# Altium PCB DIOT_Sampler.PCBDOC (part 5 of 8)
Units mm, origin at the board's own origin, x right, y up, seen from the top; angles counter-clockwise.
Board outline 221.17 x 100 mm, 4 copper layers (Top, GP1(GND), L3, Bot), stack 1.648 mm thick; 666 components, 413 nets, 2132 pads, 925 vias.
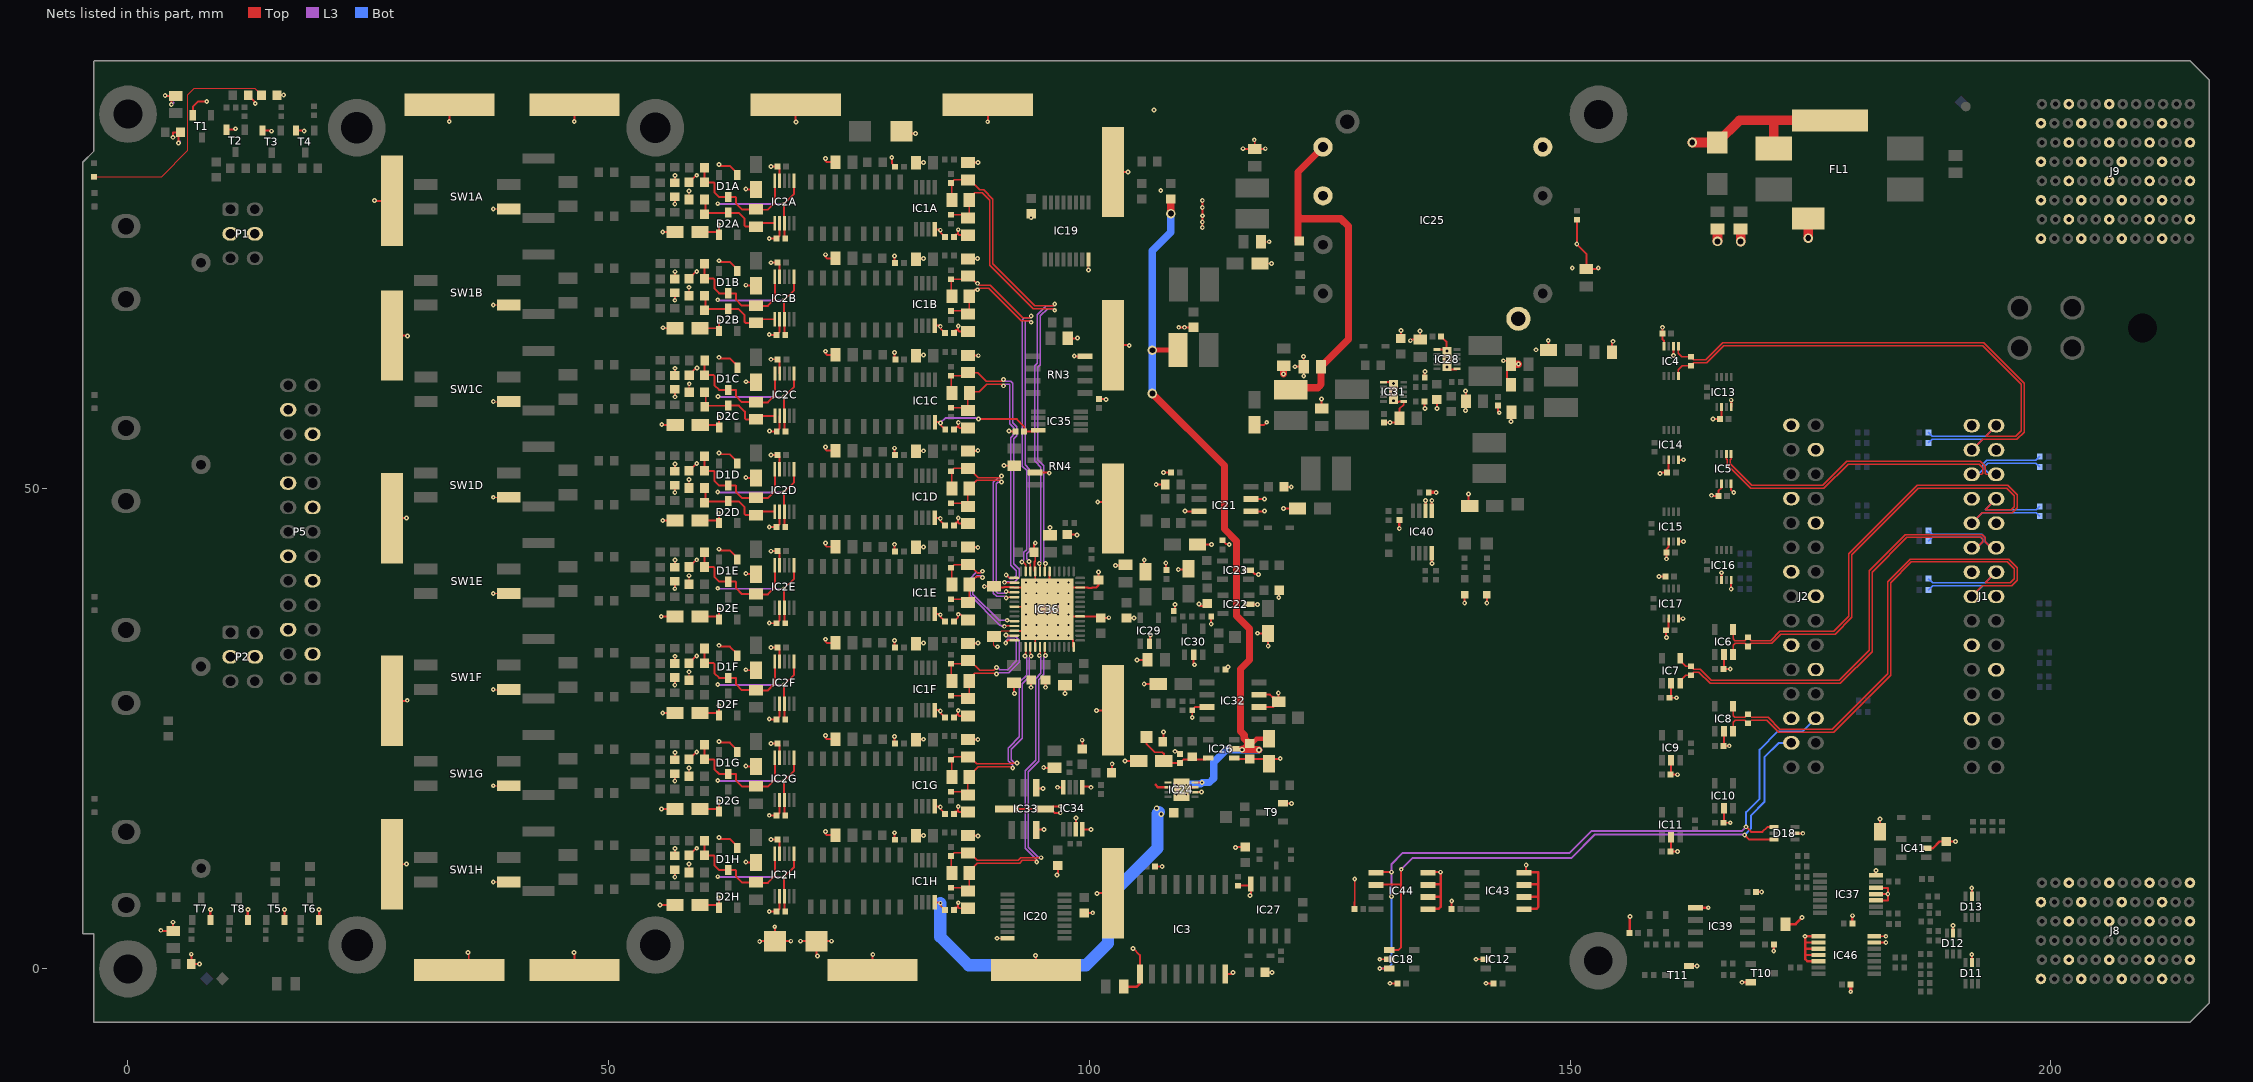
[diagram p6: the nets of this part, all layers, seen from the top]

## Via types
v1: diameter 0.5, hole 0.2, Top to Bot, tented both sides, 704 vias
v2: diameter 0.5, hole 0.2, Top to Bot, 180 vias
v3: diameter 0.6, hole 0.3, Top to Bot, tented both sides, 17 vias
v4: diameter 1, hole 0.6, Top to Bot, tented both sides, 16 vias
v5: diameter 0.6, hole 0.3, Top to Bot, 6 vias
v6: diameter 1.27, hole 0.711, Top to Bot, 2 vias

## Nets (pads, with @x,y where several pads share a name; then routed paths per layer and width w, separated by ;. In a path a pad name is that pad's centre, name@x,y a point inside that pad or via, vN(x,y) a via of type N, cw(c..) or ccw(c..) an arc to the next point about the centre after c; other vN are vias at no path point) (continued)
GND: C1A.1 C1B.1 C1C.1 C1D.1 C1E.1 C1F.1 C1G.1 C1H.1 C3A.1 C3B.1 C3C.1 C3D.1 C3E.1 C3F.1 C3G.1 C3H.1 C4A.1 C4B.1 C4C.1 C4D.1 C4E.1 C4F.1 C4G.1 C4H.1 C5A.1 C5B.1 C5C.1 C5D.1 C5E.1 C5F.1 C5G.1 C5H.1 C7A.2 C7B.2 C7C.2 C7D.2 C7E.2 C7F.2 C7G.2 C7H.2 C8A.2 C8B.2 C8C.2 C8D.2 C8E.2 C8F.2 C8G.2 C8H.2 C9A.1 C9B.1 C9C.1 C9D.1 C9E.1 C9F.1 C9G.1 C9H.1 C10A.1 C10B.1 C10C.1 C10D.1 C10E.1 C10F.1 C10G.1 C10H.1 C11A.1 C11B.1 C11C.1 C11D.1 C11E.1 C11F.1 C11G.1 C11H.1 C12A.1 C12B.1 C12C.1 C12D.1 C12E.1 C12F.1 C12G.1 C12H.1 C13A.1 C13B.1 C13C.1 C13D.1 C13E.1 C13F.1 C13G.1 C13H.1 C14A.1 C14B.1 C14C.1 C14D.1 C14E.1 C14F.1 C14G.1 C14H.1 C15.1 C16.1 C17.1 C18.1 C19.1 C20.1 C21.1 C22.1 C23.1 C24.1 C25.1 C27.1 C28.1 C30.1 C32.1 C33.1 C34.2 C36.2 C37.1 C38.2 C39.1 C41.1 C43.1 C44.2 C45.1 C47.2 C48.1 C49.1 C50.2 C51.1 C52.2 C53.1 C54.1 C55.1 C56.1 C57.1 C58.1 C59.1 C60.1 C61.1 C62.1 C63.1 C64.1 C65.1 C66.1 C67.2 C68.1 C69.1 C70.1 C71.1 C72.1 C73.1 C74.1 C76.1 C77.2 C78.1 C79.1 C80.2 C81.1 C83.1 C84.2 C85.1 C86.1 C87.1 C88.1 C89.1 C90.1 C91.1 C92.1 C93.1 C94.1 C95.1 C96.1 C97.1 C98.1 C99.1 C100.1 C101.1 C102.1 C103.1 C104.1 C105.1 C106.1 C108.1 C109.1 C110.1 C111.1 C112.1 C113.1 C114.1 C115.1 C117.1 C118.2 C119.1 C120.1 C121.1 C122.1 C123.1 CLIP1.1 CLIP2.1 CLIP3.1 CLIP4.1 CLIP5.1 CLIP6.1 CLIP7.1 CLIP8.1 CLIP9.1 CLIP10.1 CLIP11.1 CLIP12.1 CLIP13.1 CLIP14.1 CLIP15.1 CLIP16.1 CLIP17.1 CLIP18.1 D5.2 D6.1 D11.2 D12.2 D13.2 D16.2 D18.2 FL1.4 IC2A.2 IC2A.9 IC2B.2 IC2B.9 IC2C.2 IC2C.9 IC2D.2 IC2D.9 IC2E.2 IC2E.9 IC2F.2 IC2F.9 IC2G.2 IC2G.9 IC2H.2 IC2H.9 IC3.1 IC3.8 IC4.2 IC4.4 IC5.2 IC5.4 IC6.2 IC7.2 IC8.2 IC9.2 IC10.2 IC11.2 IC12.2 IC13.2 IC13.4 IC14.2 IC14.4 IC15.2 IC15.4 IC16.2 IC16.4 IC17.2 IC17.4 IC18.2 IC19.8 IC20.8 IC21.3 IC21.6 IC21.7 IC22.2 IC23.2 IC24.6 IC25.3 IC25.5 IC25.8 IC26.1 IC27.4 IC28.1 IC28.6 IC28.11 IC29.2 IC30.2 IC31.1 IC31.6 IC31.11 IC32.3 IC32.6 IC32.7 IC33.3 IC33.4 IC33.5 IC33.8 IC34.3 IC34.4 IC34.5 IC34.8 IC36.3 IC36.7 IC36.12 IC36.18 IC36.26 IC36.32 IC36.38 IC36.46 IC36.49 IC36.53 IC37.3 IC37.4 IC37.5 IC37.7 IC39.1 IC40.4 IC40.5 IC40.6 IC41.2 IC43.1 IC43.2 IC43.3 IC43.4 IC44.1 IC44.2 IC44.3 IC44.4 IC46.6 IC46.7 IC46.8 IC46.9 IC46.10 IC46.11 IC46.12 J1.1 J1.4 J1.7 J1.10 J1.13 J1.16 J1.19 J1.22 J1.25 J2.1 J2.4 J2.7 J2.10 J2.13 J2.16 J2.19 J2.22 J2.25 J8.A2 J8.A4 J8.A6 J8.C1 J8.C5 J8.D2 J8.D4 J8.D6 J8.F1 J8.F5 J8.G2 J8.G4 J8.G6 J8.I1 J8.I5 J8.J2 J8.J4 J8.J6 J8.L1 J8.L5 J9.A2 J9.A4 J9.A6 J9.C1 J9.C3 J9.C5 J9.C7 J9.D2 J9.D4 J9.D6 J9.F1 J9.F3 J9.F5 J9.F7 J9.G2 J9.G4 J9.G6 J9.G8 J9.I1 J9.I3 J9.I5 J9.I7 J9.J2 J9.J4 J9.J6 J9.J8 J9.L1 J9.L3 J9.L5 J9.L7 LD7.1 LD8.1 P1.3 P1.4 P2.3 P2.4 P5.3 P5.6 P5.9 P5.12 P5.15 P5.18 P5.21 P5.24 R4A.1 R4B.1 R4C.1 R4D.1 R4E.1 R4F.1 R4G.1 R4H.1 R11A.1 R11B.1 R11C.1 R11D.1 R11E.1 R11F.1 R11G.1 R11H.1 R35.2 R38.2 R46.1 R47.1 R49.2 R52.1 R55.1 R57.1 R62.1 R63.1 R68.1 R71.1 R74.1 R75.1 R117.1 RN3.4 RN4.7 SW1A.3 SW1B.3 SW1C.3 SW1D.3 SW1E.3 SW1F.3 SW1G.3 SW1H.3 T1.2 T2.2 T3.2 T4.2 T5.2 T6.2 T7.2 T8.2 T9.2 T10.2 T11.2 | length 520.5
  Top w0.127: v1(37.989,9.05) SW1H.3@39.586,9.05 ; v1(37.989,19.05) SW1G.3@39.586,19.05 ; v1(37.989,29.05) SW1F.3@39.586,29.05 ; v1(37.989,39.05) SW1E.3@39.586,39.05 ; v1(37.989,49.05) SW1D.3@39.586,49.05 ; v1(37.989,69.05) SW1B.3@39.586,69.05 ; v1(37.989,79.05) SW1A.3@39.586,79.05 ; v1(38.002,59.006) SW1C.3@39.599,59.006 ; C5H.1@58.362,10.02 v1(58.362,10.897) ; C5G.1@58.362,20.02 v1(58.362,20.897) ; C5F.1@58.362,30.02 v1(58.362,30.897) ; C5E.1@58.362,40.02 v1(58.362,40.897) ; C5D.1@58.362,50.02 v1(58.362,50.897) ; C5B.1@58.362,70.02 v1(58.362,70.897) ; C5A.1@58.362,80.02 v1(58.362,80.897) ; C5C.1@58.375,59.976 v1(58.375,60.853) ; v1(90.397,3.187) IC20.8@91.499,3.187 ; v1(90.444,33.505) 90.219,33.505 90.069,33.655 C96.1@90.069,34.566 90.28,34.566 90.896,35.182 91.501,35.182 91.522,35.161 92.185,35.161 IC36.12@92.189,35.165 ; v1(99.904,72.695) IC19.8@99.904,73.797 ; C50.2@117.744,73.38 v1(118.944,73.38) ; C49.1@117.844,75.63 v1(118.694,75.63)
  Top w0.203: v2(3.419,4.01) 3.474,3.955 C36.2@4.694,3.955 v2(4.694,4.855) ; v2(3.869,90.83) 3.894,90.805 C34.2@4.953,90.805 4.509,90.361 v2(4.509,89.907) ; v2(4.696,86.488) 4.696,86.982 4.716,87.002 R46.1@5.469,87.002 5.244,86.778 v2(5.244,85.909) ; v1(6.579,1.53) 6.596,1.513 R47.1@6.596,0.505 v1(7.435,0.505) ; T1.2@6.744,88.78 6.744,89.68 7.274,90.21 v1(8.195,90.21) ; T2.2@10.244,87.28 11.094,87.28 v1(11.194,87.38) ; R38.2@12.494,90.88 13.237,90.137 v1(13.237,90.01) ; T3.2@13.994,87.18 14.894,87.18 v1(14.944,87.13) ; R35.2@15.494,90.88 v1(16.194,90.88) ; T4.2@17.48,87.18 18.3,87.18 v1(18.33,87.15) ; v1(25.629,79.919) 25.668,79.88 CLIP1.1@27.444,79.88 ; CLIP2.1@27.444,10.88 28.944,10.88 v1(28.969,10.905) ; CLIP5.1@27.444,27.88 29.019,27.88 29.044,27.905 v1(29.044,27.93) ; CLIP6.1@27.444,46.88 28.969,46.88 28.994,46.905 v1(28.969,46.905) ; CLIP7.1@27.444,65.88 29.019,65.88 v1(29.069,65.83) ; v1(33.419,88.13) 33.419,88.169 33.344,88.244 33.444,88.344 CLIP18.1@33.444,89.88 ; v1(35.357,1.687) 35.444,1.6 CLIP13.1@35.444,-0.12 ; v1(46.406,1.687) 46.444,1.649 CLIP17.1@46.444,-0.12 ; v1(46.419,88.13) 46.419,88.169 46.344,88.244 46.444,88.344 CLIP8.1@46.444,89.88 ; v1(55.344,6.63) C11H.1@56.894,6.63 ; v1(55.469,36.655) 55.494,36.63 C11E.1@56.894,36.63 ; v1(55.494,16.63) C11G.1@56.894,16.63 ; v1(55.519,56.605) 55.538,56.586 C11C.1@56.907,56.586 ; v1(55.619,26.605) 55.644,26.63 C11F.1@56.894,26.63 ; v1(55.619,46.63) C11D.1@56.894,46.63 ; v1(55.619,76.63) C11A.1@56.894,76.63 ; v1(55.644,66.68) 55.694,66.63 C11B.1@56.894,66.63 ; v1(56.876,9.54) R11H.1@56.876,10.312 ; R4H.1@56.876,11.76 v1@56.876,12.52 ; v1(56.876,19.54) R11G.1@56.876,20.312 ; R4G.1@56.876,21.76 v1@56.876,22.52 ; v1(56.876,29.54) R11F.1@56.876,30.312 ; R4F.1@56.876,31.76 v1@56.876,32.52 ; v1(56.876,39.54) R11E.1@56.876,40.312 ; R4E.1@56.876,41.76 v1@56.876,42.52 ; v1(56.876,49.54) R11D.1@56.876,50.312 ; R4D.1@56.876,51.76 v1@56.876,52.52 ; v1(56.876,69.54) R11B.1@56.876,70.312 ; R4B.1@56.876,71.76 v1@56.876,72.52 ; v1(56.876,79.54) R11A.1@56.876,80.312 ; R4A.1@56.876,81.76 v1@56.876,82.52 ; v1(56.889,59.496) R11C.1@56.889,60.268 ; R4C.1@56.889,61.716 v1@56.889,62.476 ; C1H.1@58.362,11.798 v1@59.112,12.548 ; C1G.1@58.362,21.798 v1@59.112,22.548 ; C1F.1@58.362,31.798 v1@59.112,32.548 ; C1E.1@58.362,41.798 v1@59.112,42.548 ; C1D.1@58.362,51.798 v1@59.112,52.548 ; C1B.1@58.362,71.798 v1@59.112,72.548 ; C1A.1@58.362,81.798 v1@59.112,82.548 ; C1C.1@58.375,61.754 v1@59.125,62.504 ; v1(64.262,11.113) 64.317,11.058 C8H.2@65.329,11.058 ; v1(64.262,21.113) 64.317,21.058 C8G.2@65.329,21.058 ; v1(64.262,31.113) 64.317,31.058 C8F.2@65.329,31.058 ; v1(64.262,41.113) 64.317,41.058 C8E.2@65.329,41.058 ; v1(64.262,51.113) 64.317,51.058 C8D.2@65.329,51.058 ; v1(64.262,71.113) 64.317,71.058 C8B.2@65.329,71.058 ; v1(64.262,81.113) 64.317,81.058 C8A.2@65.329,81.058 ; v1(64.275,61.069) 64.33,61.014 C8C.2@65.341,61.014 ; v1(66.699,5.974) 66.724,5.948 C10H.1@67.465,5.948 67.775,6.258 IC2H.2@67.775,7.567 ; v1(66.699,15.974) 66.724,15.948 C10G.1@67.465,15.948 67.775,16.258 IC2G.2@67.775,17.567 ; v1(66.699,25.974) 66.724,25.948 C10F.1@67.465,25.948 67.775,26.258 IC2F.2@67.775,27.567 ; v1(66.699,35.974) 66.724,35.948 C10E.1@67.465,35.948 67.775,36.258 IC2E.2@67.775,37.567 ; v1(66.699,45.974) 66.724,45.948 C10D.1@67.465,45.948 67.775,46.258 IC2D.2@67.775,47.567 ; v1(66.699,65.974) 66.724,65.948 C10B.1@67.465,65.948 67.775,66.258 IC2B.2@67.775,67.567 ; v1(66.699,75.974) 66.724,75.948 C10A.1@67.465,75.948 67.775,76.258 IC2A.2@67.775,77.567 ; v1(66.711,55.93) 66.737,55.904 C10C.1@67.478,55.904 67.788,56.214 IC2C.2@67.788,57.523 ; v1(66.877,13.441) 66.884,13.448 C9H.1@67.565,13.448 67.775,13.238 IC2H.9@67.775,11.967 ; v1(66.877,23.441) 66.884,23.448 C9G.1@67.565,23.448 67.775,23.238 IC2G.9@67.775,21.967 ; v1(66.877,33.441) 66.884,33.448 C9F.1@67.565,33.448 67.775,33.238 IC2F.9@67.775,31.967 ; v1(66.877,43.441) 66.884,43.448 C9E.1@67.565,43.448 67.775,43.238 IC2E.9@67.775,41.967 ; v1(66.877,53.441) 66.884,53.448 C9D.1@67.565,53.448 67.775,53.238 IC2D.9@67.775,51.967 ; v1(66.877,73.441) 66.884,73.448 C9B.1@67.565,73.448 67.775,73.238 IC2B.9@67.775,71.967 ; v1(66.877,83.441) 66.884,83.448 C9A.1@67.565,83.448 67.775,83.238 IC2A.9@67.775,81.967 ; v1(66.889,63.397) 66.896,63.404 C9C.1@67.578,63.404 67.788,63.194 IC2C.9@67.788,61.923 ; CLIP9.1@69.444,89.88 69.444,88.123 v1(69.494,88.073) ; v1(69.944,2.88) D6.1@71.594,2.88 ; v1(71.714,1.336) 71.594,1.456 D6.1@71.594,2.88 ; v1(72.544,14.28) 72.544,14.055 72.694,13.905 C3H.1@73.569,13.905 ; v1(72.544,24.28) 72.544,24.055 72.694,23.905 C3G.1@73.569,23.905 ; v1(72.544,34.28) 72.544,34.055 72.694,33.905 C3F.1@73.569,33.905 ; v1(72.544,44.28) 72.544,44.055 72.694,43.905 C3E.1@73.569,43.905 ; v1(72.544,54.28) 72.544,54.055 72.694,53.905 C3D.1@73.569,53.905 ; v1(72.544,74.28) 72.544,74.055 72.694,73.905 C3B.1@73.569,73.905 ; v1(72.544,84.28) 72.544,84.055 72.694,83.905 C3A.1@73.569,83.905 ; v1(72.557,64.236) 72.557,64.011 72.707,63.861 C3C.1@73.582,63.861 ; v1(73.169,2.88) D6.1@71.594,2.88 ; CLIP16.1@77.444,-0.12 77.444,1.455 v1(77.469,1.48) ; v1(79.444,84.38) 79.444,83.78 C13A.1@79.794,83.43 ; v1(79.719,14.155) 79.719,13.505 C13H.1@79.794,13.43 ; v1(79.719,24.155) 79.719,23.505 C13G.1@79.794,23.43 ; v1(79.719,34.155) 79.719,33.505 C13F.1@79.794,33.43 ; v1(79.719,44.155) 79.719,43.505 C13E.1@79.794,43.43 ; v1(79.719,54.155) 79.719,53.505 C13D.1@79.794,53.43 ; v1(79.719,74.155) 79.719,73.505 C13B.1@79.794,73.43 ; v1(79.732,64.111) 79.732,63.461 C13C.1@79.807,63.386 ; D5.2@80.344,86.88 v1(81.913,86.88) ; C12H.1@81.944,13.83 81.994,13.88 v1(82.744,13.88) ; C12G.1@81.944,23.83 81.994,23.88 v1(82.744,23.88) ; C12F.1@81.944,33.83 81.994,33.88 v1(82.744,33.88) ; C12E.1@81.944,43.83 81.994,43.88 v1(82.744,43.88) ; C12D.1@81.944,53.83 81.994,53.88 v1(82.744,53.88) ; C12B.1@81.944,73.83 81.994,73.88 v1(82.744,73.88) ; C12A.1@81.944,83.83 81.994,83.88 v1(82.744,83.88) ; C12C.1@81.957,63.786 82.007,63.836 v1(82.757,63.836) ; C14H.1@85.894,6.13 85.969,6.205 85.969,6.33 86.045,6.406 86.353,6.406 ; C14G.1@85.894,16.13 85.994,16.23 85.994,16.38 86.327,16.38 86.353,16.406 ; C14F.1@85.894,26.13 86.262,26.498 86.353,26.406 ; C14D.1@85.894,46.13 86.119,46.355 86.119,46.405 86.12,46.406 86.353,46.406 ; C14B.1@85.894,66.13 86.094,66.33 86.094,66.43 86.329,66.43 86.353,66.406 ; C14A.1@85.894,76.13 86.069,76.305 86.069,76.38 86.095,76.406 86.353,76.406 ; C14C.1@85.907,56.086 86.183,56.362 86.366,56.362 ; v1@86.307,36.867 86.307,36.543 C14E.1@85.894,36.13 85.919,36.13 86.323,36.534 86.323,36.85 v1(86.353,36.88) 86.461,36.988 87.143,36.306 C4E.1@87.353,36.306 ; v1(86.353,6.88) 86.353,6.406 ; v1(86.353,16.88) 86.353,16.406 ; v1(86.353,26.88) 86.353,26.406 ; v1(86.353,46.88) 86.353,46.406 ; v1(86.353,66.88) 86.353,66.406 ; v1(86.353,76.88) 86.353,76.406 ; v1(86.366,56.836) 86.366,56.362 ; C4H.1@87.353,6.306 86.453,6.306 86.353,6.406 ; C7H.2@87.353,13.856 88.393,13.856 v1(88.419,13.83) ; C4G.1@87.353,16.306 86.453,16.306 86.353,16.406 ; C7G.2@87.353,23.856 88.393,23.856 v1(88.394,23.855) ; C4F.1@87.353,26.306 86.453,26.306 86.353,26.406 ; C7F.2@87.353,33.856 88.37,33.856 v1(88.419,33.905) ; C7E.2@87.353,43.856 88.368,43.856 v1(88.394,43.83) ; C4D.1@87.353,46.306 86.453,46.306 86.353,46.406 ; C7D.2@87.353,53.856 88.345,53.856 v1(88.394,53.905) ; C4B.1@87.353,66.306 86.453,66.306 86.353,66.406 ; C7B.2@87.353,73.856 88.32,73.856 v1(88.344,73.88) ; C4A.1@87.353,76.306 86.453,76.306 86.353,76.406 ; C7A.2@87.353,83.856 88.395,83.856 v1(88.419,83.88) ; C4C.1@87.366,56.262 86.466,56.262 86.366,56.362 ; C7C.2@87.366,63.812 88.412,63.812 v1(88.444,63.78) ; v1(89.069,39.78) 89.084,39.795 C97.1@90.069,39.795 90.199,39.665 91.091,39.665 91.146,39.72 92.134,39.72 IC36.3@92.189,39.665 93.364,39.665 IC36.53@94.364,38.665 ; v1(89.419,88.105) 89.444,88.13 CLIP10.1@89.444,89.88 ; v1(91.119,52.355) 91.144,52.33 C106.1@92.194,52.33 ; IC33.8@91.444,16.634 IC33.4@95.394,16.634 IC33.4@95.969,16.634 ; v1(91.644,55.955) 91.694,55.905 C105.1@92.319,55.905 ; C91.1@92.155,29.757 92.155,28.669 v1(92.194,28.63) ; IC36.12@92.189,35.165 93.364,35.165 IC36.53@94.364,36.165 ; IC36.7@92.189,37.665 IC36.53@95.364,37.665 ; C32.1@93.859,78.634 C32.1@93.944,78.549 ; v1(93.933,29.285) C89.1@93.933,30.035 ; v1(93.944,78.13) C32.1@93.944,78.549 ; C32.1@93.957,78.536 C32.1@93.944,78.549 ; RN4.7@94.319,51.62 95.779,51.62 v1(95.819,51.58) ; IC36.18@94.364,33.49 IC36.53@94.364,36.165 ; v1(94.369,44.305) 94.219,44.155 C90.1@94.219,43.33 94.364,43.185 94.364,42.408 94.309,42.353 94.309,41.395 IC36.49@94.364,41.34 IC36.53@94.364,38.665 ; v1(94.394,1.38) 94.444,1.33 CLIP14.1@94.444,-0.12 ; IC33.3@94.464,14.434 94.515,14.484 v1(95.272,14.484) ; IC33.5@94.464,18.834 94.535,18.763 v1(95.173,18.763) ; v1(95.244,20.93) 95.272,20.902 C99.1@96.374,20.902 ; C87.1@95.432,30.035 95.432,29.297 v1(95.444,29.285) ; IC36.46@95.864,41.34 IC36.53@95.864,37.665 ; C98.1@95.915,45.121 v1(95.915,45.921) ; v1(96.632,9.777) 96.714,9.86 C101.1@96.714,10.766 ; v1(96.694,18.881) 97.246,18.881 IC34.8@97.332,18.967 ; v1(96.971,16.23) 96.373,16.23 IC33.4@95.969,16.634 ; v1(96.971,16.909) 96.944,16.882 96.217,16.882 IC33.4@95.969,16.634 ; v1(97.444,28.63) C95.1@97.444,29.48 ; C88.1@97.694,45.18 98.644,45.18 v1(98.694,45.13) ; C103.1@97.744,65.58 98.719,65.58 98.744,65.605 v1(98.769,65.605) ; IC36.26@98.364,33.49 98.285,33.569 98.285,34.194 v1(97.814,34.665) v1(96.714,35.765) v1(95.614,36.865) IC36.53@95.614,37.415 ; v1(98.419,63.755) 98.464,63.71 RN3.4@99.544,63.71 ; IC34.3@98.594,14.505 v1(98.594,15.68) ; IC34.4@99.244,14.505 99.245,14.506 v1(100.149,14.506) ; IC34.5@99.244,18.905 99.306,18.905 99.367,18.967 99.983,18.967 100.069,18.881 v1(100.149,18.881) ; v1(99.244,23.786) 99.269,23.81 C100.1@99.269,22.88 ; C33.1@99.444,5.83 v1(100.344,5.83) ; v1(100.744,26.88) CLIP3.1@102.444,26.88 ; v1(100.794,7.83) 100.844,7.88 CLIP15.1@102.444,7.88 ; v1(100.869,48.555) 101.769,48.555 CLIP12.1@102.444,47.88 ; v1(100.944,41.28) C92.1@100.944,40.43 100.944,39.88 100.729,39.665 100.317,39.665 100.262,39.611 99.866,39.611 99.811,39.665 IC36.38@99.039,39.665 97.864,39.665 IC36.53@95.864,37.665 ; C104.1@101.019,59.255 101.694,59.255 v1(101.719,59.23) ; v1(102.019,36.53) 101.994,36.505 C93.1@101.194,36.505 101.034,36.665 IC36.32@99.039,36.665 96.364,36.665 IC36.53@95.614,37.415 ; C102.1@102.294,20.409 102.369,20.484 v1(102.369,21.33) ; CLIP4.1@102.444,64.88 104.094,64.88 v1(104.144,64.83) ; CLIP11.1@102.444,82.88 v1(104.019,82.88) ; v1(102.713,41.94) 103.662,41.94 C94.1@103.752,42.03 ; v1@103.694,21.63 C63.1@105.144,21.63 ; C71.1@103.86,36.48 103.885,36.505 v1(104.642,36.505) ; v1(104.544,2.13) 105.249,1.425 IC3.1@105.249,-0.52 ; v1(104.944,32.13) C68.1@106.044,32.13 ; v1(105.694,29.63) C84.2@107.144,29.63 ; v1(105.7,42.53) 105.7,41.411 C77.2@105.817,41.294 ; IC29.2@106.244,33.832 106.297,33.885 106.297,34.689 v1(106.35,34.742) ; C15.1@106.819,10.63 107.544,10.63 v1(107.569,10.655) ; v1(106.944,50.38) R52.1@107.894,50.38 ; R63.1@107.644,23.63 107.694,23.68 v1(107.694,24.63) ; v1(107.694,51.63) C39.1@108.494,51.63 ; v1(107.944,42.224) 107.944,41.542 C45.1@108.021,41.465 ; C76.1@108.771,37.222 108.894,37.345 v1(108.894,37.896) ; v1(108.894,22.63) 109.144,22.63 C64.1@109.444,22.33 ; v1(109.244,41.554) 110.271,41.554 C44.2@110.325,41.607 ; v1@109.269,66.755 v1(109.294,66.73) C51.1@110.819,66.73 ; v1(109.944,47.63) 109.98,47.594 IC21.3@111.393,47.594 ; v1(110.694,26.13) R75.1@110.694,26.91 111.029,27.245 IC32.3@112.244,27.245 ; IC30.2@110.845,32.679 110.845,31.729 v1(110.944,31.63) ; IC24.6@110.969,18.384 110.978,18.393 111.633,18.393 v1(111.642,18.402) ; C38.2@111.244,44.13 v1(112.694,44.13) ; v1(111.399,37.965) 111.399,37.885 111.52,37.764 111.52,37.748 111.999,37.748 C41.1@112.267,38.016 ; v1@111.744,76.93 v1(111.744,77.105) v1(111.744,77.68) v1(111.744,79.18) v1(111.744,79.93) v1@111.819,80.005 ; v1(112.664,35.88) R71.1@112.664,36.63 ; R55.1@113.819,44.561 113.839,44.561 114.027,44.373 114.027,44.353 114.207,44.173 114.499,44.173 v1(114.542,44.13) ; IC3.8@114.139,-0.52 114.794,-0.52 v1(114.944,-0.37) ; C83.1@114.144,31.13 114.396,31.382 v1(114.4,31.382) ; IC26.1@115.044,21.93 115.144,21.83 C61.1@116.694,21.83 119.794,21.83 v1(119.844,21.88) ; v1(115.194,12.63) 115.244,12.68 C65.1@116.194,12.68 ; R62.1@115.444,8.66 116.619,8.66 IC27.4@116.789,8.83 116.789,7.725 v1(116.694,7.63) ; v1(115.969,85.305) 115.994,85.28 C48.1@117.194,85.28 ; IC23.2@116.544,41.469 116.819,41.469 117.216,41.072 117.537,41.072 v1(117.594,41.015) ; IC22.2@116.594,37.915 117.476,37.915 v1(117.48,37.911) ; IC21.6@116.793,47.594 118.158,47.594 v1(118.194,47.63) ; IC21.7@116.793,48.864 118.178,48.864 v1(118.194,48.88) ; v1(117.144,86.23) 117.194,86.18 C48.1@117.194,85.28 ; C60.1@117.194,56.58 118.169,56.58 v1(118.444,56.855) ; v1(117.494,34.905) 117.519,34.88 C47.2@118.594,34.88 v1(118.594,33.58) ; IC32.6@117.644,27.245 119.159,27.245 C81.1@119.694,27.78 C81.1@119.569,27.905 ; IC32.7@117.644,28.515 118.759,28.515 118.994,28.28 119.194,28.28 C81.1@119.569,27.905 ; C72.1@118.244,-0.37 v1(118.994,-0.37) ; v1(118.294,85.305) 118.269,85.28 C48.1@117.194,85.28 ; v1(119.644,28.705) 119.644,27.98 C81.1@119.569,27.905 ; v1(119.694,38.63) 119.744,38.68 C43.1@119.744,39.38 ; T9.2@120.129,17.217 121.007,17.217 v1(121.019,17.205) ; v1(120.194,47.88) C80.2@121.644,47.88 ; C37.1@120.244,50.13 v1(120.994,50.13) ; v1(121.369,62.63) C58.1@122.294,62.63 ; v1(122.269,63.68) 122.294,63.655 C58.1@122.294,62.63 ; v1(122.294,61.68) C58.1@122.294,62.63 ; v1(124.136,59.27) 124.161,59.245 C79.1@124.161,58.27 ; C122.1@127.58,6.25 127.58,6.95 127.587,6.95 127.596,6.958 v2(127.596,9.36) ; v2(130.2,1) IC18.2@131.2,1 ; IC31.6@130.591,61.02 131.141,61.02 131.641,60.52 v5(131.641,60.02) 131.641,59.445 132.141,58.945 132.216,59.02 IC31.1@132.691,59.02 132.691,58.695 132.241,58.245 C86.1@132.241,57.27 132.066,57.095 132.066,56.82 v1(131.266,56.82) C78.1@130.641,56.82 ; v2(131.248,-1.493) 131.35,-1.493 131.35,-1.5 C121.1@132.05,-1.5 ; C66.1@132.391,65.57 132.391,66.37 v1(132.416,66.395) ; v1(133.378,65.34) 133.494,65.455 C74.1@134.409,65.455 134.409,66.309 v1(134.378,66.34) ; C85.1@134.841,59.02 134.841,58.32 v1(134.891,58.27) ; R74.1@134.861,61.52 134.861,62.115 v1(134.891,62.145) ; IC44.4@135.267,10.055 v2(136.529,10.055) ; v1(136.141,58.27) R68.1@136.141,59.22 ; IC28.1@136.142,64.415 136.824,64.415 IC28.11@137.192,64.046 ; C73.1@136.591,65.77 137.125,65.236 137.125,64.35 v5(137.192,64.282) IC28.11@137.192,64.046 ; v5(137.192,62.59) 137.442,62.34 138.168,62.34 IC28.6@138.242,62.415 ; v5(137.192,63.415) IC28.11@137.192,64.046 ; C120.1@137.68,6.25 137.68,6.95 137.687,6.95 v2(137.687,7.052) ; v2(139.03,38.039) LD7.1@139.03,38.925 ; v1(139.128,58.068) 139.148,58.088 139.148,60.071 v1(139.128,60.09) ; v1(139.428,49.403) 139.428,48.305 C67.2@139.569,48.164 ; v2(140.2,1) IC12.2@141.2,1 ; v2(141.248,-1.493) 141.35,-1.493 141.35,-1.5 C119.1@142.05,-1.5 ; v2(141.33,38.039) LD8.1@141.33,38.925 ; C69.1@142.512,58.594 142.512,57.957 v1(142.628,57.84) ; v1(143.046,63.248) 143.506,63.248 C55.1@143.853,62.901 ; C55.1@143.43,62.847 143.43,61.166 C56.1@143.853,60.742 ; v1(143.847,56.922) 143.904,56.979 C57.1@143.904,57.872 ; v2(145.426,10.808) 145.43,10.804 IC43.4@145.43,10.055 ; v1(147.723,65.355) 147.748,65.33 C52.2@147.748,64.38 ; R57.1@150.694,77.91 v1(150.694,75.38) 151.694,74.38 C53.1@151.694,72.78 153.03,72.78 v1(152.924,72.886) ; C54.1@154.344,64.13 154.344,65.173 v1(154.444,65.273) ; v2(159.244,40.818) C25.1@159.923,40.818 ; v1(159.36,51.53) 159.45,51.62 C30.1@160.088,51.62 160.25,51.782 IC14.2@160.25,52.95 ; v2(159.6,66.725) C23.1@159.6,66.1 159.6,65.5 159.75,65.35 IC4.4@159.75,64.75 ; v1(160.017,42.648) 160.017,43.648 160.25,43.88 IC15.2@160.25,44.45 ; v1(160.025,34.475) 159.967,34.533 C27.1@159.967,35.222 160.25,35.505 IC17.2@160.25,36.45 ; C16.1@160.35,28.2 160.5,28.35 IC7.2@160.5,29.7 IC7.2@160.45,29.65 ; C16.1@160.4,28.2 v2(161.05,28.2) ; C18.1@160.45,12.2 160.5,12.25 IC11.2@160.5,13.7 ; C20.1@160.45,20.2 160.5,20.25 IC9.2@160.5,21.7 ; C18.1@160.5,12.2 v2(161.15,12.2) ; C20.1@160.5,20.2 v2(161.15,20.2) ; v2(160.75,63.8) IC4.2@160.75,64.75 ; IC14.4@161.25,52.95 v2(161.8,52.95) ; IC17.4@161.25,36.45 161.7,36.45 v1(161.725,36.425) ; IC15.4@161.25,44.45 v1(161.8,44.45) ; v1(164.712,49.254) 164.778,49.188 C22.1@165.418,49.188 165.418,49.709 165.75,50.041 IC5.2@165.75,50.45 ; v2(164.856,57.185) C28.1@165.564,57.185 165.75,57.371 IC13.2@165.75,58.45 ; IC16.2@165.75,40.45 v1(165.75,41.2) ; C19.1@165.95,15.2 166,15.25 IC10.2@166,16.7 ; C21.1@165.95,23.2 166,23.25 IC8.2@166,24.7 ; C19.1@166,15.2 v2(166.65,15.2) ; C21.1@166,23.2 v2(166.55,23.2) ; IC6.2@166,32.7 166,31.2 v2(166.65,31.2) ; IC5.4@166.75,50.45 166.75,49.802 v1(167.012,49.54) ; v1(166.75,39.525) IC16.4@166.75,40.45 ; D18.2@173.4,14.1 v2(174.2,14.1) ; IC46.6@181.631,2.742 v2(182.833,2.742) ; IC46.7@181.631,3.392 v2(182.833,3.392) ; IC37.3@181.801,7.125 183.041,7.125 v2(183.041,7.775) ; IC37.4@181.801,7.775 v2(183.041,7.775) ; IC37.5@181.801,8.425 183.041,8.425 v2(183.041,7.775) ; D12.2@189.83,3.75 v2(189.83,4.51) ; v2(191.772,1.5) 191.78,1.492 D11.2@191.78,0.65 ; v2(191.772,8.4) 191.78,8.392 D13.2@191.78,7.55 ; IC36.53@94.364,36.165 IC36.53@95.614,37.415 ; IC36.53@94.364,38.665 IC36.53@95.364,37.665 ; IC36.53@95.364,37.665 IC36.53@95.614,37.415 ; IC36.53@95.614,37.415 IC36.53@95.864,37.665
  Top w0.254: T7.2@8.58,5.2 v2(8.58,6.18) ; T8.2@12.48,5.2 v2(12.48,6.18) ; T5.2@16.28,5.2 v2(16.28,6.18) ; T6.2@19.88,5.2 v2(19.88,6.18) ; R49.2@103.58,-1.85 104.949,-1.85 105.249,-1.55 IC3.1@105.249,-0.52 ; v2(132.23,45.789) C113.1@132.23,46.7 ; IC40.6@134.961,47.65 v2(134.961,48.72) ; IC44.1@135.267,6.245 136.319,6.245 136.529,6.455 136.529,7.47 ; IC44.2@135.267,7.515 136.484,7.515 136.529,7.47 ; IC44.3@135.267,8.785 136.529,8.785 ; IC40.4@135.611,43.25 135.611,42.169 v2(135.63,42.15) ; IC40.5@135.611,47.65 v2(135.611,48.72) ; v2(136.529,10.055) 136.529,8.785 ; IC43.1@145.43,6.245 146.482,6.245 146.692,6.455 146.692,7.47 ; IC43.2@145.43,7.515 146.647,7.515 146.692,7.47 ; IC43.3@145.43,8.785 146.692,8.785 ; IC43.4@145.43,10.055 145.456,10.029 146.692,10.029 146.692,8.785 ; C112.1@156.18,3.75 156.18,5.4 v2(156.23,5.45) ; T11.2@162.38,0.3 v2(163.182,0.3) ; IC39.1@163.03,6.355 v2(164.364,6.355) ; IC13.4@166.75,58.45 v1(166.75,59.148) ; v2(167.88,-1.4) T10.2@168.78,-1.4 ; C110.1@169.35,8 169.917,8 v2(169.922,8.005) ; v2(171.18,1.86) C111.1@171.18,2.55 ; C109.1@172.39,4.652 173.444,4.652 174.13,5.339 v2(174.119,5.339) ; IC46.12@175.831,0.792 174.673,0.792 174.438,1.028 174.438,1.442 ; IC46.11@175.831,1.442 174.438,1.442 ; IC46.10@175.831,2.092 174.438,2.092 ; IC46.9@175.831,2.742 174.438,2.742 ; IC46.8@175.831,3.392 v2(174.438,3.392) 174.438,2.742 ; C108.1@179.358,4.718 v2(179.358,5.53) ; IC37.7@181.801,9.725 v2(181.801,10.221) ; C118.2@182.23,14.25 v2(182.23,15.601) ; IC41.2@187.03,12.55 187.73,12.55 188.43,13.25 C117.1@189.13,13.25 v2(190.079,13.25) ; 136.529,7.47 136.529,8.785 ; 146.692,7.47 146.692,8.785 ; 174.438,1.442 174.438,2.092 ; 174.438,2.092 174.438,2.742
  Top w0.381: R117.1@135.3,49.558 v2(136.068,49.558) ; v2(179.181,-2.383) C123.1@179.181,-1.615
  Top w0.762: v1(120.194,61.88) C59.1@120.194,62.73 ; C55.1@143.853,62.901 v1(144.62,62.901)
  Top w1: v4(162.69,85.95) D16.2@165.3,85.95 167.6,88.25 171.175,88.25 ; v4(165.33,75.666) C114.1@165.33,76.95 ; v4(167.73,75.65) C115.1@167.73,76.95 ; FL1.4@171.175,85.35 171.175,88.25 ; v4(174.775,76.005) FL1.4@174.775,78.05 ; FL1.4@177.025,88.25 171.175,88.25
  L3 w0.203: v2(4.509,89.907) 4.547,89.907 4.744,90.105 ; v2(5.244,85.909) v2@5.415,86.08
  other v1: 56.891,12.512 59.162,12.548 103.694,21.63 56.891,22.512 59.162,22.548 56.891,32.512 59.162,32.548 93.414,34.665 94.514,34.665 95.614,34.665 96.714,34.665 93.414,35.765 94.514,35.765 95.614,35.765 97.814,35.765 93.414,36.865 94.514,36.865 96.714,36.865 97.814,36.865 93.414,37.965 94.514,37.965 95.614,37.965 96.714,37.965 97.814,37.965 93.414,39.065 94.514,39.065 95.614,39.065 96.714,39.065 97.814,39.065 93.414,40.165 94.514,40.165 95.614,40.165 96.714,40.165 97.814,40.165 56.891,42.512 59.162,42.548 56.891,52.512 59.162,52.548 56.903,62.468 59.175,62.504 146.452,64.389 109.894,66.73 56.891,72.512 59.162,72.548 150.216,72.912 111.769,78.33 107.419,80.955 56.891,82.512 59.162,82.548 106.707,89.336
  other v5: 131.641,59.095 131.641,60.87
I2C_SCL1: D18.6 IC18.1 IC44.6 J2.27 | length 64.9
  Top w0.203: IC44.6@129.867,8.785 132.43,8.785 ; IC18.1@131.2,1.95 132.12,1.95 132.43,2.26 132.43,8.785 ; v2(132.43,10.355) 132.43,8.785 ; v2(168.15,13.925) 168.625,13.45 D18.6@171.2,13.45
  L3 w0.203: v2(132.43,10.355) 133.585,11.51 150.091,11.51 152.556,13.975 168.1,13.975 v2(168.15,13.925)
  Bot w0.203: v2(168.15,13.925) 168.8,14.575 168.8,15.95 170.208,17.358 170.208,22 171.723,23.516 J2.27@173.002,23.516
I2C_SDA1: D18.4 IC18.3 IC44.5 J2.26 | length 72
  Top w0.203: IC44.5@129.867,10.055 v2(131.43,10.055) ; v2(130.2,0.05) IC18.3@131.2,0.05 ; v2(168.3,14.775) 168.825,14.25 170,14.25 170.5,14.75 D18.4@171.2,14.75
  L3 w0.203: v2(131.431,7.531) v2(131.43,10.055) v2(131.43,10.055) 131.43,10.908 132.557,12.036 149.908,12.036 152.198,14.325 167.85,14.325 v2(168.3,14.775)
  Bot w0.203: v2(130.2,0.05) 130.98,0.05 131.431,0.501 v2(131.431,7.531) ; v2(168.3,14.775) 168.3,16.3 169.7,17.7 169.7,22.814 171.587,24.7 174.186,24.7 J2.26@175.542,26.056
IN_0_N: C4A.2 C6A.2 IC36.47 R6A.2 | length 51.1
  Top w0.152: R6A.2@85.603,78.426 87.033,78.426 C4A.2@87.353,78.106 87.503,78.256 C6A.2@87.503,79.956 87.503,80.139 88.094,80.73 88.858,80.73 89.644,79.944 89.644,73.205 94.169,68.68 96.22,68.68 v1(96.394,68.506) ; IC36.47@95.364,41.34 95.364,42.079 v1(95.44,42.155)
  L3 w0.152: v1(95.44,42.155) 95.266,42.329 95.266,52.314 94.635,52.946 94.635,62.596 94.899,62.86 94.899,67.93 95.649,68.68 96.22,68.68 v1(96.394,68.506)
IN_0_P: C6A.1 C7A.1 IC36.48 R12A.2 | length 51.6
  Top w0.152: C6A.1@85.703,79.956 85.703,81.636 R12A.2@85.603,81.736 85.923,82.056 C7A.1@87.353,82.056 87.568,82.056 88.589,81.035 88.984,81.035 89.949,80.07 89.949,73.331 94.295,68.985 96.22,68.985 v1(96.394,69.159) ; v1(94.788,42.155) 94.864,42.079 IC36.48@94.864,41.34
  L3 w0.152: v1(94.788,42.155) 94.962,42.329 94.962,52.187 94.419,52.73 94.33,52.819 94.33,62.722 94.419,62.811 94.594,62.986 94.594,68.056 95.523,68.985 96.22,68.985 v1(96.394,69.159)
IN_1_N: C4B.2 C6B.2 IC36.50 R6B.2 | length 39.4
  Top w0.152: R6B.2@85.603,68.426 87.033,68.426 C4B.2@87.353,68.106 87.503,68.256 C6B.2@87.503,69.956 88.069,70.522 88.069,70.68 88.328,70.68 88.348,70.66 v1(88.348,70.634) 88.532,70.817 89.544,70.817 92.931,67.43 93.77,67.43 v1(93.944,67.256) ; v1(93.719,42.365) 93.719,42.224 93.864,42.079 IC36.50@93.864,41.34
  L3 w0.152: v1(93.719,42.365) 93.719,42.43 93.494,42.655 93.494,43.183 93.766,43.455 93.766,51.989 93.333,52.422 93.333,67.394 93.369,67.43 93.77,67.43 v1(93.944,67.256)
IN_1_P: C6B.1 C7B.1 IC36.51 R12B.2 | length 40
  Top w0.152: C6B.1@85.703,69.956 85.603,70.056 R12B.2@85.603,71.736 86.875,71.736 87.195,72.056 C7B.1@87.353,72.056 87.543,72.056 88.244,71.355 88.303,71.355 v1(88.353,71.305) 88.536,71.122 89.67,71.122 93.057,67.735 93.77,67.735 v1(93.944,67.909) ; v1(92.969,42.33) 93.113,42.33 93.24,42.202 93.24,42.167 93.364,42.044 IC36.51@93.364,41.34
  L3 w0.152: v1(92.969,42.33) 93.189,42.55 93.189,43.309 93.462,43.581 93.462,51.862 93.028,52.296 93.028,67.521 93.243,67.735 93.77,67.735 v1(93.944,67.909)
IN_2_N: C4C.2 C6C.2 IC36.1 R6C.2 | length 31.6
  Top w0.152: R6C.2@85.616,58.382 87.046,58.382 C4C.2@87.366,58.062 87.366,59.762 C6C.2@87.516,59.912 87.516,60.202 87.712,60.005 88.53,60.005 89.341,60.815 90.895,60.815 v1(91.069,60.641) ; v1(91.344,40.98) 91.644,40.68 91.644,40.665 IC36.1@92.189,40.665
  L3 w0.152: v1(91.069,60.641) 91.243,60.815 91.669,60.815 91.719,60.765 91.719,56.699 92.144,56.274 92.144,55.58 91.919,55.355 91.83,55.266 91.83,41.996 92.396,41.43 92.396,40.872 92.091,40.568 91.756,40.568 v1(91.344,40.98)
IN_2_P: C6C.1 C7C.1 IC36.2 R12C.2 | length 32.4
  Top w0.152: C6C.1@85.716,59.912 85.616,60.012 R12C.2@85.616,61.692 87.046,61.692 C7C.1@87.366,62.012 88.392,62.012 89.285,61.12 90.895,61.12 v1(91.069,61.294) ; v1(91.174,40.207) 91.328,40.207 91.37,40.165 IC36.2@92.189,40.165
  L3 w0.152: v1(91.069,61.294) 91.243,61.12 91.795,61.12 92.024,60.891 92.024,56.825 92.449,56.4 92.449,55.454 92.135,55.139 92.135,42.122 92.702,41.555 92.702,40.747 92.218,40.263 91.229,40.263 v1(91.174,40.207)
IN_3_N: C4D.2 C6D.2 IC36.4 R6D.2 | length 21.5
  Top w0.152: R6D.2@85.603,48.426 87.033,48.426 C4D.2@87.353,48.106 87.353,49.806 C6D.2@87.503,49.956 87.503,50.039 88.264,50.8 90.67,50.8 v1(90.844,50.626) ; v1(91.344,39.242) 91.42,39.165 IC36.4@92.189,39.165
  L3 w0.152: v1(90.844,50.626) 90.47,50.626 90.319,50.475 90.319,39.218 90.469,39.068 91.17,39.068 v1(91.344,39.242)
IN_3_P: C6D.1 C7D.1 IC36.5 R12D.2 | length 22.7
  Top w0.152: C6D.1@85.703,49.956 85.703,51.636 R12D.2@85.603,51.736 85.923,52.056 C7D.1@87.353,52.056 87.493,52.056 88.444,51.105 90.67,51.105 v1(90.844,51.279) ; v1(91.344,38.589) 91.42,38.665 IC36.5@92.189,38.665
  L3 w0.152: v1(90.844,51.279) 90.67,51.105 90.518,51.105 90.014,50.601 90.014,39.092 90.343,38.763 91.17,38.763 v1(91.344,38.589)
IN_4_N: C4E.2 C6E.2 IC36.10 R6E.2 | length 13
  Top w0.152: R6E.2@85.603,38.426 87.033,38.426 C4E.2@87.353,38.106 87.503,38.256 C6E.2@87.503,39.956 87.503,40.064 88.244,40.805 ; 88.218,40.805 88.244,40.805 ; v1(88.869,40.706) 88.77,40.805 88.244,40.805
  L3 w0.152: v1(88.869,40.706) 88.695,40.88 88.319,40.88 87.891,40.452 87.891,38.971 90.605,36.257 v1(91.449,36.257)
IN_4_P: C6E.1 C7E.1 IC36.11 R12E.2 | length 15
  Top w0.152: C6E.1@85.703,39.956 85.703,41.636 R12E.2@85.603,41.736 85.923,42.056 C7E.1@87.353,42.056 87.468,42.056 88.369,41.155 88.369,41.13 88.616,41.13 88.845,41.359 v1(88.869,41.359) ; v1(91.149,35.632) 91.182,35.665 IC36.11@92.189,35.665
  L3 w0.152: v1(88.869,41.359) 88.695,41.185 88.193,41.185 87.586,40.578 87.586,38.845 90.668,35.763 90.769,35.763 90.9,35.632 v1(91.149,35.632)
IN_5_N: C4F.2 C6F.2 IC36.13 R6F.2 | length 14.9
  Top w0.152: R6F.2@85.603,28.426 87.033,28.426 C4F.2@87.353,28.106 87.503,28.256 C6F.2@87.503,29.956 87.503,30.164 88.089,30.75 90.195,30.75 90.225,30.78 v1(90.349,30.657) ; v1(91.319,34.742) 91.395,34.665 IC36.13@92.189,34.665
  L3 w0.152: v1@90.225,30.78 90.27,30.825 91.62,30.825 92.699,31.904 92.699,34.184 92.315,34.568 91.493,34.568 v1(91.319,34.742)
IN_5_P: C6F.1 C7F.1 IC36.14 R12F.2 | length 14.2
  Top w0.152: C6F.1@85.703,29.956 85.603,30.056 R12F.2@85.603,31.736 87.033,31.736 C7F.1@87.353,32.056 87.568,32.056 88.569,31.055 90.069,31.055 v1(90.344,31.33) ; v1(91.294,33.88) 91.579,34.165 IC36.14@92.189,34.165
  L3 w0.152: v1(90.344,31.33) 90.494,31.33 90.694,31.13 91.494,31.13 92.394,32.03 92.394,34.058 92.189,34.263 91.493,34.263 91.294,34.064 v1(91.294,33.88)
IN_6_N: C4G.2 C6G.2 IC36.16 R6G.2 | length 22.6
  Top w0.152: R6G.2@85.603,18.426 87.033,18.426 C4G.2@87.353,18.106 87.353,19.806 C6G.2@87.503,19.956 87.503,20.114 88.414,21.025 90.119,21.025 90.132,21.038 91.892,21.038 v1(92.024,20.906) ; v1(93.288,32.555) 93.364,32.631 IC36.16@93.364,33.49
  L3 w0.152: v1(92.024,20.906) 92.024,21.166 91.664,21.525 91.575,21.614 91.575,22.986 91.664,23.075 92.714,24.125 92.714,29.786 93.462,30.533 93.462,32.381 v1(93.288,32.555)
IN_6_P: C6G.1 C7G.1 IC36.17 R12G.2 | length 22.5
  Top w0.152: C6G.1@85.703,19.956 85.703,21.636 R12G.2@85.603,21.736 85.923,22.056 C7G.1@87.353,22.056 87.568,22.056 88.269,21.355 90.119,21.355 90.132,21.342 91.769,21.342 91.811,21.385 92.452,21.385 v1(92.474,21.406) ; IC36.17@93.864,33.49 93.864,32.631 v1(93.94,32.555)
  L3 w0.152: v1(92.474,21.406) 92.214,21.406 91.88,21.741 91.88,22.86 93.019,23.999 93.019,29.66 93.766,30.407 93.766,32.381 v1(93.94,32.555)
IN_7_N: C4H.2 C6H.2 IC36.19 R6H.2 | length 35.2
  Top w0.152: R6H.2@85.603,8.426 87.033,8.426 C4H.2@87.353,8.106 87.503,8.256 C6H.2@87.503,9.956 87.503,10.164 88.351,11.012 92.732,11.012 92.999,11.279 94.345,11.279 v1(94.519,11.105) ; v1(94.788,32.58) 94.864,32.656 IC36.19@94.864,33.49
  L3 w0.152: v1(94.519,11.105) 94.519,11.351 93.339,12.531 93.339,20.625 94.414,21.7 94.414,30.2 94.962,30.748 94.962,32.406 v1(94.788,32.58)
IN_7_P: C6H.1 C7H.1 IC36.20 R12H.2 | length 35.2
  Top w0.152: C6H.1@85.703,9.956 85.603,10.056 R12H.2@85.603,11.736 85.923,12.056 C7H.1@87.353,12.056 87.429,11.98 87.644,11.98 88.307,11.317 92.606,11.317 92.873,11.584 94.717,11.584 94.735,11.566 v1(94.98,11.566) ; IC36.20@95.364,33.49 95.364,32.656 v1(95.44,32.58)
  L3 w0.152: v1(94.98,11.566) 94.735,11.566 93.644,12.657 93.644,20.499 94.719,21.574 94.719,30.074 95.266,30.621 95.266,32.406 v1(95.44,32.58)
LVDS_DUAL_N0: IC4.1 J1.3 R14.1 R138.2 | length 58.1
  Top w0.152: IC4.1@161.25,64.75 161.25,64.018 161.598,63.67 R14.1@162.55,63.67 162.868,63.352 164.102,63.352 165.855,65.105 193.02,65.105 197.205,60.92 197.205,55.832 196.47,55.098 192.9,55.098 J1.3@191.772,53.97
  Bot w0.152: R138.2@187.27,54.7 187.668,55.098 192.9,55.098 J1.3@191.772,53.97
LVDS_DUAL_N1: IC5.5 J1.6 R139.2 | length 39.4
  Top w0.152: IC5.5@166.75,53.55 166.75,53.049 166.652,52.952 166.652,52.548 168.9,50.3 176.269,50.3 178.78,52.811 192.655,52.811 193.195,52.271 193.195,51.52 193.284,51.43 J1.6@194.312,51.43
  Bot w0.152: J1.6@194.312,51.43 193.654,51.43 193.195,51.89 193.195,52.341 193.451,52.598 198.432,52.598 R139.2@198.83,52.2
LVDS_DUAL_N2: IC6.4 J1.9 R15.1 R140.2 | length 56.2
  Top w0.152: IC6.4@166.95,35.3 166.95,34.324 167.122,34.152 168.182,34.152 R15.1@168.5,34.47 168.818,34.152 170.852,34.152 171.802,35.102 177.427,35.102 179,36.675 179,43.2 186.105,50.305 195.516,50.305 196.497,49.325 196.497,47.965 195.979,47.448 192.87,47.448 J1.9@191.772,46.35
  Bot w0.152: J1.9@191.772,46.35 192.87,47.448 197.337,47.448 198.482,47.448 R140.2@198.83,47.1
LVDS_DUAL_N3: IC7.4 J1.12 R16.1 R141.2 | length 53.9
  Top w0.152: IC7.4@161.45,32.3 161.45,32.05 162.03,31.47 R16.1@162.55,31.47 162.868,31.152 163.527,31.152 164.68,30 177.975,30 181.1,33.125 181.1,41.4 184.873,45.173 192.874,45.173 193.195,44.852 193.195,44.411 193.796,43.81 J1.12@194.312,43.81
  Bot w0.152: R141.2@187.27,45.6 187.668,45.202 ; 187.668,45.2 192.816,45.2 193.195,44.821 193.195,44.411 193.796,43.81 J1.12@194.312,43.81
LVDS_DUAL_N4: IC8.4 J1.15 R17.1 R142.2 | length 58.4
  Top w0.152: IC8.4@166.95,27.3 166.95,26.324 167.122,26.152 168.182,26.152 R17.1@168.5,26.47 ; 168.818,26.152 170.58,26.152 171.807,24.925 177.275,24.925 183.025,30.675 183.025,40.283 185.37,42.628 195.603,42.628 196.497,41.734 196.497,40.425 195.91,39.838 192.88,39.838 J1.15@191.772,38.73
  Bot w0.152: R142.2@187.27,39.4 187.718,39.848 192.89,39.848 J1.15@191.772,38.73
LVDS_DUAL_P0: IC4.8 J1.2 R14.2 R122.2 | length 57
  Top w0.152: IC4.8@161.25,61.65 161.25,62.326 161.654,62.73 R14.2@162.55,62.73 162.868,63.048 164.229,63.048 165.981,64.8 192.894,64.8 196.9,60.794 196.9,55.958 196.344,55.402 193.204,55.402 J1.2@194.312,56.51
  Bot w0.152: R122.2@187.27,55.8 187.668,55.402 193.204,55.402 J1.2@194.312,56.51
LVDS_DUAL_P1: IC5.6 J1.5 R123.2 | length 39.9
  Top w0.152: IC5.6@166.25,53.55 166.25,53.049 166.347,52.952 166.347,52.422 168.774,49.995 176.395,49.995 178.906,52.506 192.528,52.506 192.89,52.144 192.89,51.52 192.801,51.43 J1.5@191.772,51.43
  Bot w0.152: J1.5@191.772,51.43 192.43,51.43 192.89,51.89 192.89,52.467 193.325,52.902 198.432,52.902 R123.2@198.83,53.3
LVDS_DUAL_P2: IC6.3 J1.8 R15.2 R124.2 | length 54.7
  Top w0.152: IC6.3@166.95,32.7 166.95,33.644 167.154,33.848 168.182,33.848 R15.2@168.5,33.53 168.818,33.848 170.979,33.848 171.929,34.798 177.554,34.798 179.305,36.549 179.305,43.074 186.231,50 195.39,50 196.192,49.198 196.192,48.091 195.853,47.752 193.174,47.752 J1.8@194.312,48.89
  Bot w0.152: J1.8@194.312,48.89 193.174,47.752 198.218,47.752 198.482,47.752 R124.2@198.83,48.1
LVDS_DUAL_P3: IC7.3 J1.11 R16.2 R125.2 | length 52.9
  Top w0.152: IC7.3@161.45,29.7 161.45,29.95 162.03,30.53 R16.2@162.55,30.53 162.868,30.848 163.401,30.848 164.554,29.695 178.101,29.695 181.405,32.999 181.405,41.274 184.999,44.868 192.747,44.868 192.89,44.726 192.89,44.411 192.289,43.81 J1.11@191.772,43.81
  Bot w0.152: R125.2@187.27,44.5 187.668,44.898 189.89,44.898 ; 189.893,44.895 192.69,44.895 192.89,44.695 192.89,44.411 192.289,43.81 J1.11@191.772,43.81
LVDS_DUAL_P4: IC8.3 J1.14 R17.2 R126.2 | length 57.3
  Top w0.152: IC8.3@166.95,24.7 166.95,25.644 167.154,25.848 168.182,25.848 R17.2@168.5,25.53 ; 168.818,25.848 170.454,25.848 171.681,24.62 177.401,24.62 183.33,30.549 183.33,40.157 185.496,42.324 195.476,42.324 196.192,41.608 196.192,40.551 195.793,40.152 193.194,40.152 J1.14@194.312,41.27
  Bot w0.152: R126.2@187.27,40.6 187.718,40.152 193.194,40.152 J1.14@194.312,41.27
MP: D22.1 R35.1 | length 24.9
  Top w0.127: D22.1@-3.52,82.4 3.5,82.4 6.229,85.129 6.229,88.176 6.229,89.384 6.229,90.929 6.91,91.61 13.165,91.61 R35.1@13.894,90.88
N12V0A: C10A.2 C10B.2 C10C.2 C10D.2 C10E.2 C10F.2 C10G.2 C10H.2 C11A.2 C11B.2 C11C.2 C11D.2 C11E.2 C11F.2 C11G.2 C11H.2 C14A.2 C14B.2 C14C.2 C14D.2 C14E.2 C14F.2 C14G.2 C14H.2 C46.2 C63.2 C64.2 C105.2 D1A.1 D1B.1 D1C.1 D1D.1 D1E.1 D1F.1 D1G.1 D1H.1 D2A.1 D2B.1 D2C.1 D2D.1 D2E.1 D2F.1 D2G.1 D2H.1 D6.2 IC1A.4 IC1B.4 IC1C.4 IC1D.4 IC1E.4 IC1F.4 IC1G.4 IC1H.4 IC2A.3 IC2A.6 IC2B.3 IC2B.6 IC2C.3 IC2C.6 IC2D.3 IC2D.6 IC2E.3 IC2E.6 IC2F.3 IC2F.6 IC2G.3 IC2G.6 IC2H.3 IC2H.6 IC24.1 IC24.2 IC26.5 IC35.4 R61.2 TP9.1 | length 231
  Top w0.203: C11H.2@59.494,6.63 61.209,6.63 D2H.1@61.483,6.356 61.483,7.356 v1(61.444,7.395) ; C11G.2@59.494,16.63 61.209,16.63 D2G.1@61.483,16.356 61.483,17.356 v1(61.444,17.395) ; C11F.2@59.494,26.63 61.209,26.63 D2F.1@61.483,26.356 61.483,27.356 v1(61.444,27.395) ; C11E.2@59.494,36.63 61.209,36.63 D2E.1@61.483,36.356 61.483,37.356 v1(61.444,37.395) ; C11D.2@59.494,46.63 61.209,46.63 D2D.1@61.483,46.356 61.483,47.356 v1(61.444,47.395) ; C11B.2@59.494,66.63 61.209,66.63 D2B.1@61.483,66.356 61.483,67.356 v1(61.444,67.395) ; C11A.2@59.494,76.63 61.209,76.63 D2A.1@61.483,76.356 61.483,77.356 v1(61.444,77.395) ; C11C.2@59.507,56.586 61.222,56.586 D2C.1@61.496,56.312 61.496,57.312 v1(61.457,57.352) ; v1(61.468,13.653) 61.595,13.526 62.611,13.526 63.383,12.754 D1H.1@63.383,12.641 ; v1(61.468,23.653) 61.595,23.526 62.611,23.526 63.383,22.754 D1G.1@63.383,22.641 ; v1(61.468,33.653) 61.595,33.526 62.611,33.526 63.383,32.754 D1F.1@63.383,32.641 ; v1(61.468,43.653) 61.595,43.526 62.611,43.526 63.383,42.754 D1E.1@63.383,42.641 ; v1(61.468,53.653) 61.595,53.526 62.611,53.526 63.383,52.754 D1D.1@63.383,52.641 ; v1(61.468,73.653) 61.595,73.526 62.611,73.526 63.383,72.754 D1B.1@63.383,72.641 ; v1(61.468,83.653) 61.595,83.526 62.611,83.526 63.383,82.754 D1A.1@63.383,82.641 ; v1(61.481,63.609) 61.608,63.482 62.624,63.482 63.396,62.71 D1C.1@63.396,62.597 ; D1H.1@63.383,12.568 D1H.1@63.383,12.641 ; D1G.1@63.383,22.568 D1G.1@63.383,22.641 ; D1F.1@63.383,32.568 D1F.1@63.383,32.641 ; D1E.1@63.383,42.568 D1E.1@63.383,42.641 ; D1D.1@63.383,52.568 D1D.1@63.383,52.641 ; D1B.1@63.383,72.568 D1B.1@63.383,72.641 ; D1A.1@63.383,82.568 D1A.1@63.383,82.641 ; D1C.1@63.396,62.524 D1C.1@63.396,62.597 ; D1H.1@63.455,12.688 63.396,12.628 D1H.1@63.383,12.641 ; D1G.1@63.455,22.688 63.396,22.628 D1G.1@63.383,22.641 ; D1F.1@63.455,32.688 63.396,32.628 D1F.1@63.383,32.641 ; D1E.1@63.455,42.688 63.396,42.628 D1E.1@63.383,42.641 ; D1D.1@63.455,52.688 63.396,52.628 D1D.1@63.383,52.641 ; D1B.1@63.455,72.688 63.396,72.628 D1B.1@63.383,72.641 ; D1A.1@63.455,82.688 63.396,82.628 D1A.1@63.383,82.641 ; D1C.1@63.468,62.644 63.408,62.585 D1C.1@63.396,62.597 ; v1(65.707,2.836) 65.75,2.88 D6.2@67.294,2.88 ; v1(67.269,4.38) 67.269,4.405 67.294,4.38 D6.2@67.294,2.88 ; C10H.2@68.215,6.098 C10H.2@68.275,6.038 ; C10G.2@68.215,16.098 C10G.2@68.275,16.038 ; C10F.2@68.215,26.098 C10F.2@68.275,26.038 ; C10E.2@68.215,36.098 C10E.2@68.275,36.038 ; C10D.2@68.215,46.098 C10D.2@68.275,46.038 ; C10B.2@68.215,66.098 C10B.2@68.275,66.038 ; C10A.2@68.215,76.098 C10A.2@68.275,76.038 ; C10C.2@68.228,56.054 C10C.2@68.288,55.994 ; C10H.2@68.365,5.948 C10H.2@68.275,6.038 ; C10G.2@68.365,15.948 C10G.2@68.275,16.038 ; C10F.2@68.365,25.948 C10F.2@68.275,26.038 ; C10E.2@68.365,35.948 C10E.2@68.275,36.038 ; C10D.2@68.365,45.948 C10D.2@68.275,46.038 ; C10B.2@68.365,65.948 C10B.2@68.275,66.038 ; C10A.2@68.365,75.948 C10A.2@68.275,76.038 ; C10C.2@68.378,55.904 C10C.2@68.288,55.994 ; v1(68.944,2.88) D6.2@67.294,2.88 ; IC2H.6@69.275,11.967 69.275,10.596 v1(68.215,9.536) 68.215,8.7 68.227,8.688 68.227,7.615 IC2H.3@68.275,7.567 C10H.2@68.275,6.038 ; IC2G.6@69.275,21.967 69.275,20.596 v1(68.215,19.536) 68.215,18.7 68.227,18.688 68.227,17.615 IC2G.3@68.275,17.567 C10G.2@68.275,16.038 ; IC2F.6@69.275,31.967 69.275,30.596 v1(68.215,29.536) 68.215,28.7 68.227,28.688 68.227,27.615 IC2F.3@68.275,27.567 C10F.2@68.275,26.038 ; IC2E.6@69.275,41.967 69.275,40.596 v1(68.215,39.536) 68.215,38.7 68.227,38.688 68.227,37.615 IC2E.3@68.275,37.567 C10E.2@68.275,36.038 ; IC2D.6@69.275,51.967 69.275,50.596 v1(68.215,49.536) 68.215,48.7 68.227,48.688 68.227,47.615 IC2D.3@68.275,47.567 C10D.2@68.275,46.038 ; IC2B.6@69.275,71.967 69.275,70.596 v1(68.215,69.536) 68.215,68.7 68.227,68.688 68.227,67.615 IC2B.3@68.275,67.567 C10B.2@68.275,66.038 ; IC2A.6@69.275,81.967 69.275,80.596 v1(68.215,79.536) 68.215,78.7 68.227,78.688 68.227,77.615 IC2A.3@68.275,77.567 C10A.2@68.275,76.038 ; IC2C.6@69.288,61.923 69.288,60.553 v1(68.228,59.493) 68.228,58.656 68.239,58.644 68.239,57.571 IC2C.3@68.288,57.523 C10C.2@68.288,55.994 ; IC1H.4@83.919,6.909 84.415,6.909 v1(84.494,6.83) 84.494,6.63 C14H.2@84.994,6.13 ; IC1G.4@83.919,16.909 84.415,16.909 v1(84.494,16.83) 84.494,16.63 C14G.2@84.994,16.13 ; IC1F.4@83.919,26.909 84.415,26.909 v1(84.494,26.83) 84.494,26.63 C14F.2@84.994,26.13 ; IC1E.4@83.919,36.909 84.415,36.909 v1(84.494,36.83) 84.494,36.63 C14E.2@84.994,36.13 ; IC1D.4@83.919,46.909 84.415,46.909 v1(84.494,46.83) 84.494,46.63 C14D.2@84.994,46.13 ; IC1B.4@83.919,66.909 84.415,66.909 v1(84.494,66.83) 84.494,66.63 C14B.2@84.994,66.13 ; IC1A.4@83.919,76.909 84.415,76.909 v1(84.494,76.83) 84.494,76.63 C14A.2@84.994,76.13 ; IC1C.4@83.932,56.865 84.428,56.865 v1(84.507,56.786) 84.507,56.586 C14C.2@85.007,56.086 ; v1(88.469,57.18) 92.444,57.18 93.244,56.38 93.219,56.355 C105.2@93.219,55.905 94.594,55.905 IC35.4@94.694,56.005 ; TP9.1@105.944,24.13 105.944,23.38 106.794,22.53 107.594,22.53 107.744,22.38 107.744,21.63 107.944,21.43 C64.2@109.444,21.43 109.805,21.791 112.078,21.791 IC26.5@112.217,21.93
  Top w0.254: 106.894,19.155 106.894,19.134 107.144,18.884 IC24.2@108.169,18.884
  L3 w0.203: v1(61.341,9.589) 61.394,9.536 v1(68.215,9.536) ; v1(61.341,19.589) 61.394,19.536 v1(68.215,19.536) ; v1(61.341,29.589) 61.394,29.536 v1(68.215,29.536) ; v1(61.341,39.589) 61.394,39.536 v1(68.215,39.536) ; v1(61.341,49.589) 61.394,49.536 v1(68.215,49.536) ; v1(61.341,69.589) 61.394,69.536 v1(68.215,69.536) ; v1(61.341,79.589) 61.394,79.536 v1(68.215,79.536) ; v1(61.354,59.545) 61.406,59.493 v1(68.228,59.493) ; v1(84.507,56.786) 85.035,57.315 88.334,57.315 v1(88.469,57.18)
  Bot w1.27: v1(84.494,6.83) 84.494,3.33 87.456,0.368 99.65,0.368 101.944,2.662 101.944,7.393 107.088,12.536 107.088,16.174 107.219,16.305
  other v3: 107.47,16.089 106.994,16.707
N13V0: C61.2 C62.2 IC24.7 IC24.8 IC24.9 IC26.2 L6.2 R42.2 | length 83.6
  Top w0.254: v2(110.069,19.134) 110.069,19.082 110.267,18.884 IC24.7@110.969,18.884 ; IC24.8@110.969,19.384 v1(111.724,19.384)
  Top w0.508: v4(106.55,64.35) 106.575,64.375 L6.2@109.2,64.375 ; IC26.2@115.044,22.88 v3@115.919,22.88 ; C61.2@116.719,23.43 116.886,23.43 117.386,23.93 C62.2@118.694,23.93
  Top w0.762: v4(106.55,59.85) 114.044,52.356 114.044,45.748 115.3,44.492 115.3,36.715 116.28,35.735 116.28,35.724 116.644,35.36 116.644,32.122 115.707,31.185 115.707,24.71 116.102,24.315 116.102,23.956 116.628,23.43 116.669,23.43 116.069,22.83 115.919,22.83 115.936,22.813 117.592,22.813 v3(117.641,22.764) ; R42.2@108.444,80.08 108.444,78.581 v4@108.475,78.55
  Bot w0.762: v4(106.55,59.85) v4(106.55,64.35) 106.55,74.675 108.475,76.6 v4@108.475,78.55 ; v2(109.069,19.134) v2(110.069,19.134) v2@110.069,19.334 ; 110.418,19.227 111.568,19.227 v1(111.724,19.384) 112.498,19.384 112.944,19.83 112.944,21.484 114.224,22.764 v3(117.641,22.764)
  other v2: 109.069,18.134 110.069,18.134
  other v3: 115.866,22.785
  other v4: 108.475,78.555
N13V0S: C58.2 IC25.4 L5.1 R58.1 | length 42.8
  Top w0.203: L5.1@120.944,60.23 123.544,60.23 123.744,60.43 123.944,60.63 123.944,62.48 C58.2@124.094,62.63
  Top w0.762: L5.1@120.944,60.23 121.144,60.43 123.744,60.43 ; R58.1@121.694,75.68 121.763,75.749 R58.1@121.813,75.749 ; R58.1@121.813,75.699 121.763,75.699 121.738,75.724 121.694,75.768 121.694,78.33 ; 123.944,60.63 124.094,60.78 C58.2@124.094,62.63 126.194,64.73 126.944,65.48 126.944,77.235 126.149,78.03 121.994,78.03 121.694,78.33 ; IC25.4@124.294,85.485 121.694,82.885 121.694,78.33
NetC1A_2: C1A.2 C2A.2 D1A.3 IC2A.10 R3A.2 | length 13.5
  Top w0.203: R3A.2@59.962,83.322 C1A.2@59.962,81.798 60.903,81.798 60.983,81.718 60.983,80.768 61.483,80.268 D1A.3@62.433,80.268 63.202,80.268 63.246,80.224 63.246,79.589 63.845,78.99 C2A.2@65.329,78.99 65.365,78.954 66.548,78.954 67.275,79.681 IC2A.10@67.275,81.967
NetC1B_2: C1B.2 C2B.2 D1B.3 IC2B.10 R3B.2 | length 13.5
  Top w0.203: R3B.2@59.962,73.322 C1B.2@59.962,71.798 60.903,71.798 60.983,71.718 60.983,70.768 61.483,70.268 D1B.3@62.433,70.268 63.202,70.268 63.246,70.224 63.246,69.589 63.845,68.99 C2B.2@65.329,68.99 65.365,68.954 66.548,68.954 67.275,69.681 IC2B.10@67.275,71.967
NetC1C_2: C1C.2 C2C.2 D1C.3 IC2C.10 R3C.2 | length 13.5
  Top w0.203: R3C.2@59.975,63.278 C1C.2@59.975,61.754 60.916,61.754 60.996,61.674 60.996,60.724 61.496,60.224 D1C.3@62.446,60.224 63.215,60.224 63.259,60.18 63.259,59.545 63.857,58.947 C2C.2@65.341,58.947 65.378,58.91 66.561,58.91 67.288,59.637 IC2C.10@67.288,61.923
NetC1D_2: C1D.2 C2D.2 D1D.3 IC2D.10 R3D.2 | length 13.5
  Top w0.203: R3D.2@59.962,53.322 C1D.2@59.962,51.798 60.903,51.798 60.983,51.718 60.983,50.768 61.483,50.268 D1D.3@62.433,50.268 63.202,50.268 63.246,50.224 63.246,49.589 63.845,48.99 C2D.2@65.329,48.99 65.365,48.954 66.548,48.954 67.275,49.681 IC2D.10@67.275,51.967
NetC1E_2: C1E.2 C2E.2 D1E.3 IC2E.10 R3E.2 | length 13.5
  Top w0.203: R3E.2@59.962,43.322 C1E.2@59.962,41.798 60.903,41.798 60.983,41.718 60.983,40.768 61.483,40.268 D1E.3@62.433,40.268 63.202,40.268 63.246,40.224 63.246,39.589 63.845,38.99 C2E.2@65.329,38.99 65.365,38.954 66.548,38.954 67.275,39.681 IC2E.10@67.275,41.967
NetC1F_2: C1F.2 C2F.2 D1F.3 IC2F.10 R3F.2 | length 13.5
  Top w0.203: R3F.2@59.962,33.322 C1F.2@59.962,31.798 60.903,31.798 60.983,31.718 60.983,30.768 61.483,30.268 D1F.3@62.433,30.268 63.202,30.268 63.246,30.224 63.246,29.589 63.845,28.99 C2F.2@65.329,28.99 65.365,28.954 66.548,28.954 67.275,29.681 IC2F.10@67.275,31.967
NetC1G_2: C1G.2 C2G.2 D1G.3 IC2G.10 R3G.2 | length 13.5
  Top w0.203: R3G.2@59.962,23.322 C1G.2@59.962,21.798 60.903,21.798 60.983,21.718 60.983,20.768 61.483,20.268 D1G.3@62.433,20.268 63.202,20.268 63.246,20.224 63.246,19.589 63.845,18.99 C2G.2@65.329,18.99 65.365,18.954 66.548,18.954 67.275,19.681 IC2G.10@67.275,21.967
NetC1H_2: C1H.2 C2H.2 D1H.3 IC2H.10 R3H.2 | length 13.5
  Top w0.203: R3H.2@59.962,13.322 C1H.2@59.962,11.798 60.903,11.798 60.983,11.718 60.983,10.768 61.483,10.268 D1H.3@62.433,10.268 63.202,10.268 63.246,10.224 63.246,9.589 63.845,8.99 C2H.2@65.329,8.99 65.365,8.954 66.548,8.954 67.275,9.681 IC2H.10@67.275,11.967
NetC2A_1: C2A.1 C5A.2 D2A.3 IC2A.1 R10A.2 | length 9.7
  Top w0.203: C5A.2@60.082,79.9 60.082,78.616 62.393,78.616 D2A.3@62.399,78.622 ; D2A.3@62.433,78.656 D2A.3@62.399,78.622 ; IC2A.1@67.275,77.567 65.705,77.567 C2A.1@65.329,77.19 64.249,77.19 64.142,77.298 64.142,78.004 63.524,78.622 D2A.3@62.399,78.622
NetC2B_1: C2B.1 C5B.2 D2B.3 IC2B.1 R10B.2 | length 9.7
  Top w0.203: C5B.2@60.082,69.9 60.082,68.616 62.393,68.616 D2B.3@62.399,68.622 ; D2B.3@62.433,68.656 D2B.3@62.399,68.622 ; IC2B.1@67.275,67.567 65.705,67.567 C2B.1@65.329,67.19 64.249,67.19 64.142,67.298 64.142,68.004 63.524,68.622 D2B.3@62.399,68.622
NetC2C_1: C2C.1 C5C.2 D2C.3 IC2C.1 R10C.2 | length 9.7
  Top w0.203: C5C.2@60.095,59.856 60.095,58.572 62.406,58.572 D2C.3@62.412,58.578 ; D2C.3@62.446,58.612 D2C.3@62.412,58.578 ; IC2C.1@67.288,57.523 65.718,57.523 C2C.1@65.341,57.147 64.262,57.147 64.154,57.254 64.154,57.96 63.536,58.578 D2C.3@62.412,58.578
NetC2D_1: C2D.1 C5D.2 D2D.3 IC2D.1 R10D.2 | length 9.7
  Top w0.203: C5D.2@60.082,49.9 60.082,48.616 62.393,48.616 D2D.3@62.399,48.622 ; D2D.3@62.433,48.656 D2D.3@62.399,48.622 ; IC2D.1@67.275,47.567 65.705,47.567 C2D.1@65.329,47.19 64.249,47.19 64.142,47.298 64.142,48.004 63.524,48.622 D2D.3@62.399,48.622